# Altium PCB Alarm_clock_layout.pcbdoc
Units mil, origin at the board's own origin, x right, y up, seen from the top; angles counter-clockwise.
Board outline 3937.01 x 2952.76 mil, 2 copper layers (Top Layer, Bottom Layer); 36 components, 40 nets, 128 pads, 1 vias.
Unrouted connection lines stored in the file: 84.
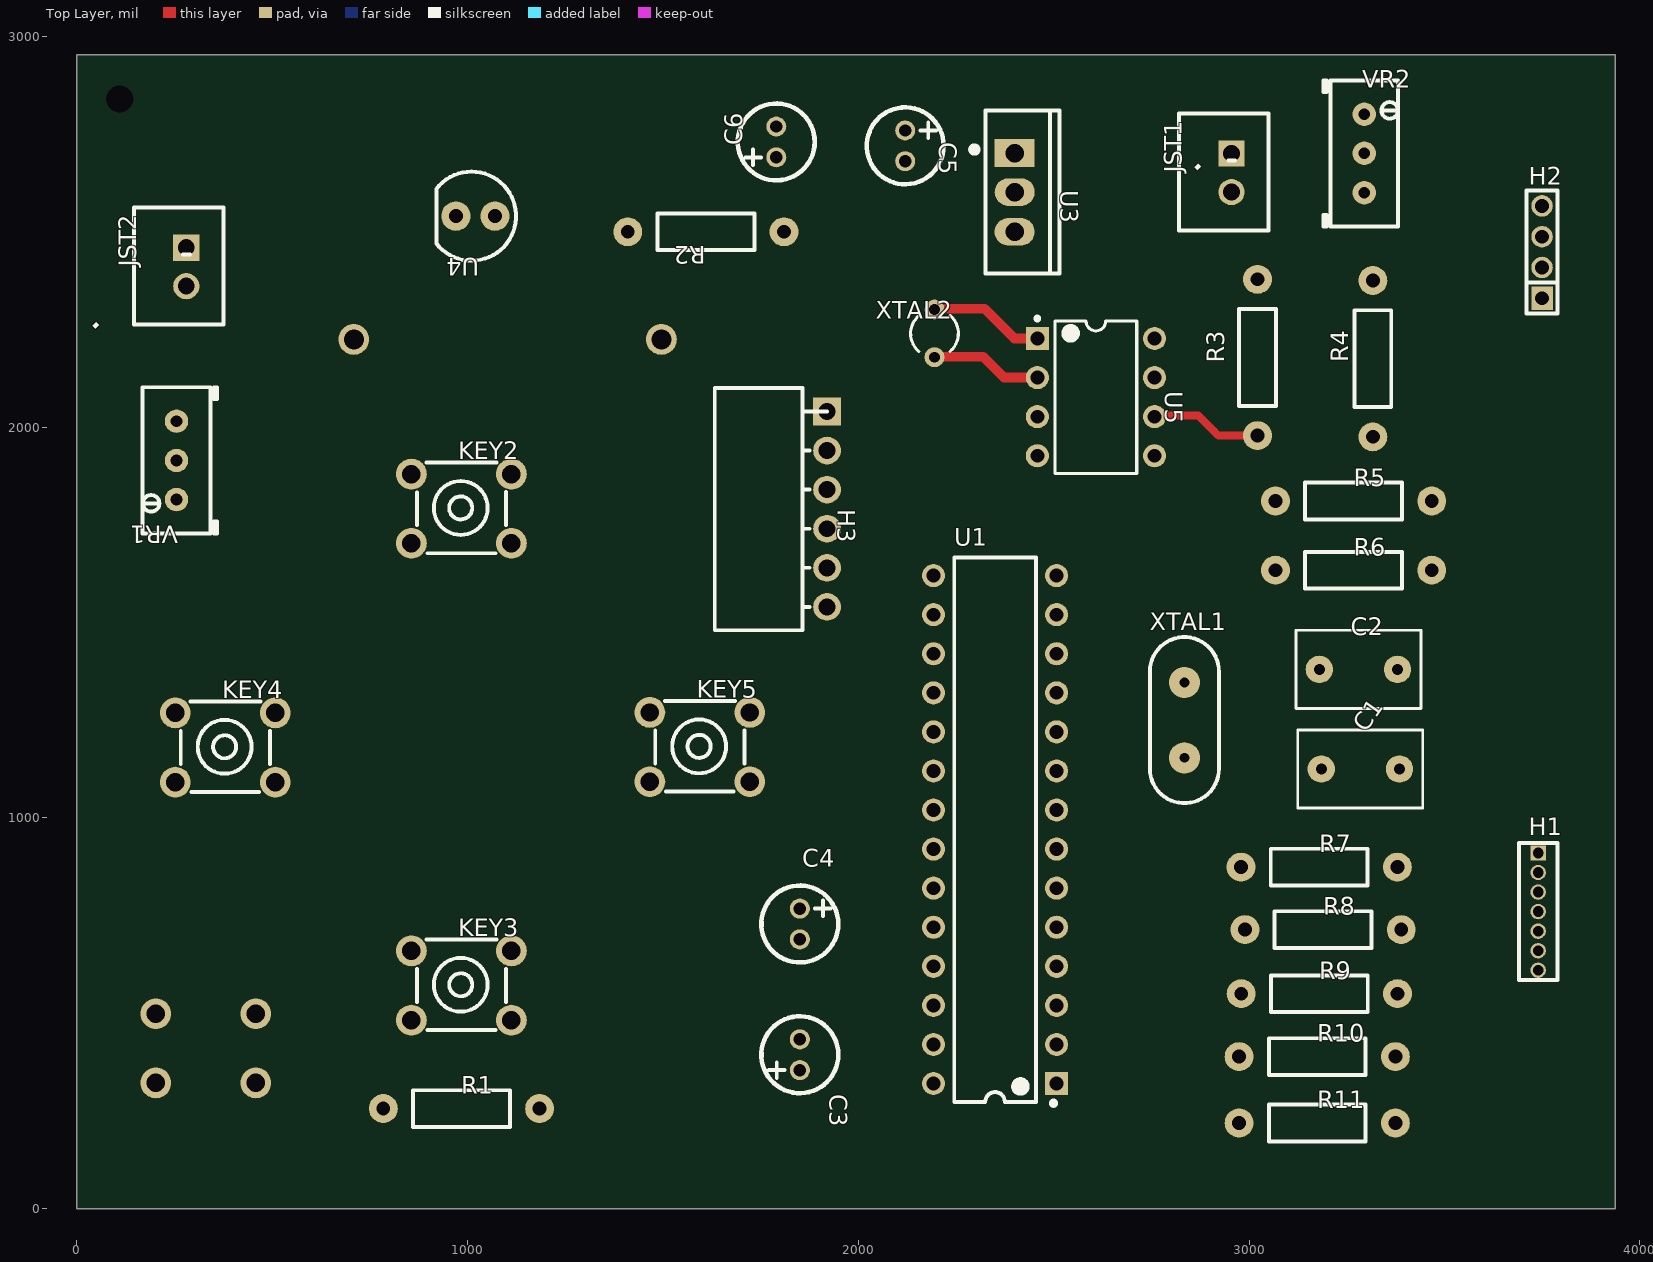
[diagram p0: Top Layer view]
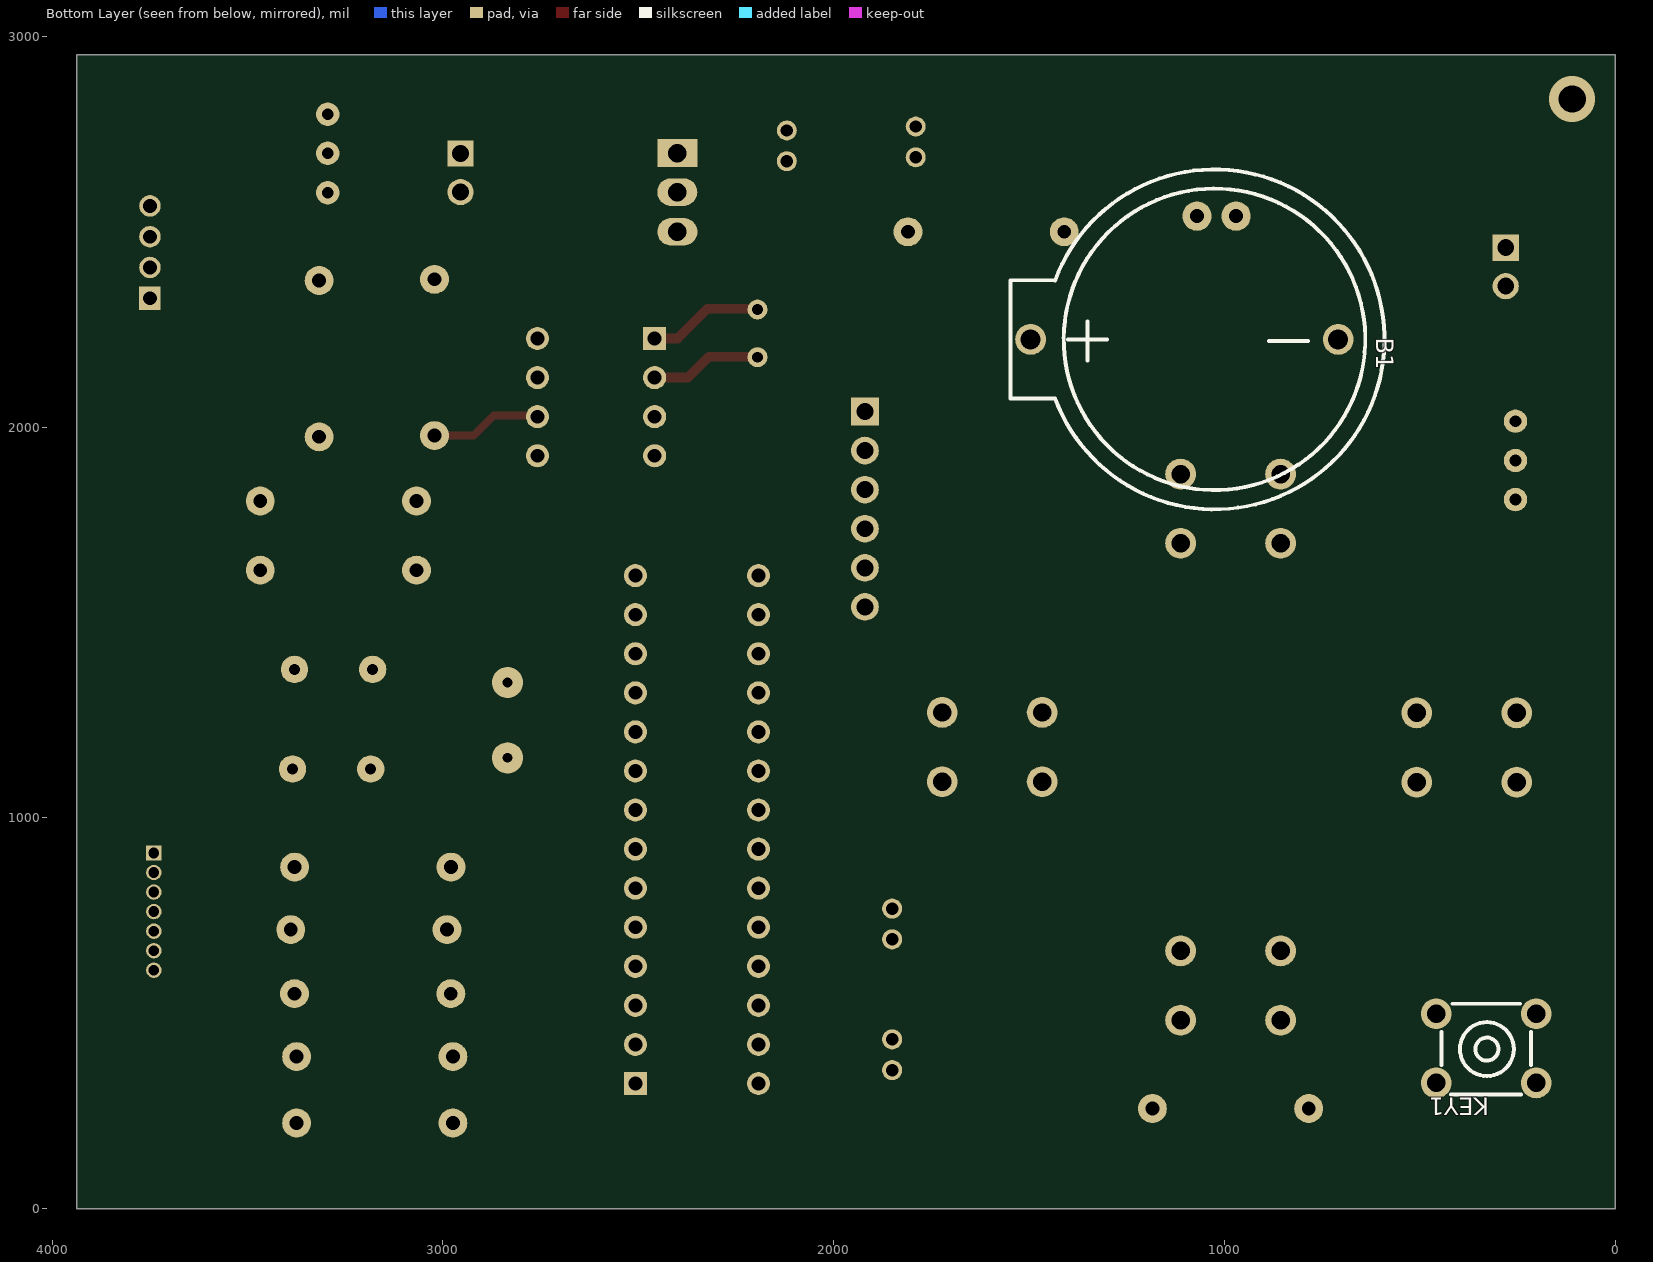
[diagram p1: Bottom Layer view, seen from below]

## Layer stack, top to bottom
Top Solder: solder mask 0.4, Solder Resist, Dk 3.5
Top Layer: signal copper 1.4
Dielectric1: dielectric 12.6, FR-4, Dk 4.8
Bottom Layer: signal copper 1.4
Bottom Solder: solder mask 0.4, Solder Resist, Dk 3.5

## Board outline
3937.01,0 0,0 0,2952.76 3937.01,2952.76

## Design rules (kind name [scope] priority, off if disabled: settings)
Clearance [All] p1: gap=15 ignorepadtopadclearanceinfootprint=FALSE except(10: Arc-THPad Track-THPad SMDPad-THPad THPad-THPad)
ComponentClearance [All] p1 off: gap=10 collisioncheckmode=3 verticalgap=10 showdistances=FALSE
Height [All] p1: minheight=0 maxheight=1181.1 prefheight=500
PolygonConnect [All] p1: connectstyle=Relief reliefconductorwidth=10 reliefentries=4 polygonreliefangle="90 Angle" airgapwidth=10
RoutingVias [All] p1: holewidth=50 width=100 viastyle="Through Hole" minholewidth=28 minwidth=50 maxholewidth=150 maxwidth=200
SolderMaskExpansion [All] p1: expansion=4 istentingtop=FALSE
Width Width_1 [InNet('+5V') or InNet('GND') or InNet('VCC')] p1: maxlimit=30 minlimit=25 preferedwidth=25 minimp=50.000000 maximp=50.000000 favimp=50.000000
Width [All] p2: maxlimit=25 minlimit=20 preferedwidth=20 minimp=50.000000 maximp=50.000000 favimp=50.000000
28 further rules are at their usual default settings.

## Components (designator, comment, footprint, x,y, rotation, side; value= is the part's Value field where it differs from the comment)
B1 "CR2032 3V" BAT-TH_BS-2-1 1102.36,2224.41 r90 bottom
C1 "100nF" RAD-0.2 3285,1125 r0 top
C2 "100nF" RAD-0.2 3280,1380 r0 top
C3 "100nF" CAP-TH_BD5.0-P2.00-D0.8-FD 1850.39,393.7 r90 top
C4 "100nF" CAP-TH_BD5.0-P2.00-D0.8-FD 1850.39,728.35 r270 top
C5 "100nF" CAP-TH_BD5.0-P2.00-D0.8-FD 2120,2720 r270 top
C6 "100nF" CAP-TH_BD5.0-P2.00-D0.8-FD 1790,2730 r90 top
H1 "KEYPAD" HDR-TH_7P-P1.27-V-M 3740,760 r270 top
H2 "LCD_1602" HDR-TH_4P-P2.00-V-M 3750,2448.11 r90 top
H3 "LCD_1602" HDR-TH_6P-P2.54-H-F-W5.7 1920,1790 r270 top
JST1 "JST_2 PIN" CONN-TH_XHB-2A 2955,2650.75 r90 top
JST2 "JST_2 PIN" CONN-TH_XHB-2A 280,2410 r90 top
KEY1 "Push_Button" KEY-TH_4P-L6.0-W6.0-P4.50 330,410 r0 bottom
KEY2 "Push_Button" KEY-TH_4P-L6.0-W6.0-P4.50 984.25,1791.34 r0 top
KEY3 "Push_Button" KEY-TH_4P-L6.0-W6.0-P4.50 984.25,570.87 r0 top
KEY4 "Push_Button" KEY-TH_4P-L6.0-W6.0-P4.50 380,1180 r0 top
KEY5 "Push_Button" KEY-TH_4P-L6.0-W6.0-P4.50 1594.49,1181.1 r0 top
R1 "RESISTOR" AXIAL-0.4 984.25,255.91 r0 top value=Value
R2 "330R" AXIAL-0.4 1610,2500 r180 top value=Value
R3 "10k" AXIAL-0.4 3021.65,2178.35 r90 top value=Value
R4 "10k" AXIAL-0.4 3316.93,2175.2 r90 top value=Value
R5 "100R" AXIAL-0.4 3267.72,1811.02 r0 top value=Value
R6 "100R" AXIAL-0.4 3267.72,1633.86 r0 top value=Value
R7 "100R" AXIAL-0.4 3179.65,873.94 r0 top value=Value
R8 "100R" AXIAL-0.4 3189.65,713.94 r0 top value=Value
R9 "100R" AXIAL-0.4 3180,550 r0 top value=Value
R10 "100R" AXIAL-0.4 3174.65,388.94 r0 top value=Value
R11 "100R" AXIAL-0.4 3174.65,218.94 r0 top value=Value
U1 "ATMEGA _328P-PU" DIP-28_L34.6-W7.3-P2.54-LS10.2-BL 2350,970 r90 top
U3 "7805_Regulator" TO-220-3_L10.0-W4.5-P2.54-L 2400.2,2600.79 r270 top
U4 "LED" "5MM LED" 1070,2540 r180 top
U5 "DS1307" DIP-8_L9.8-W6.6-P2.54-LS7.6-BL 2608.27,2076.77 r270 top
VR1 "1k" RES-ADJ-TH_3296W 255,1915 r180 top
VR2 "1k" RES-ADJ-TH_3296W 3295,2700.39 r0 top
XTAL1 "16MHz" "16MHZ_OSC [PCB]" 2834.65,1250 r180 top
XTAL2 "32.768KHz" R38 2195,2240 r0 top

## Footprints (in the part's own frame and the unit in brackets; to place one, negate y for a bottom-side part, rotate by r counter-clockwise, add the part's x,y. Pads: shape width x height; smd on the part's side, far side on the other; paste and mask are expansions set on the pad)
"5MM LED" [mm]
  round 1.9 hole 0.914: 1(0,0) 2(2.54,0)
  silkscreen extent -1.37,-2.9 3.81,2.9
"16MHZ_OSC [PCB]" [mil]
  round 80 hole 25: 1(0,96.46) 2(0,-96.46)
  silkscreen extent -89,-212 89,212
AXIAL-0.4 [mil]
  round 74 hole 35.4: 1(-200,0) 2(200,0)
  silkscreen extent -124,-47 124,47
BAT-TH_BS-2-1 [mm]
  round 2 hole 1.3: 1(0,10) 2(0,-10)
  silkscreen extent -11.04,-13 11.05,11.3
CAP-TH_BD5.0-P2.00-D0.8-FD [mm]
  round 1.3 hole 0.8: 1(-1,0) 2(1,0)
  silkscreen extent -2.5,-2.5 2.5,2.5
CONN-TH_XHB-2A [mm]
  rect 1.7x1.7 hole 1.1: 1(1.251,0)
  round 1.7 hole 1.1: 2(-1.251,0)
  silkscreen extent -3.75,-2.42 3.86,3.4
DIP-8_L9.8-W6.6-P2.54-LS7.6-BL [mm]
  rect 1.5x1.5 hole 0.9: 1(-3.81,-3.81)
  round 1.5 hole 0.9: 2(-1.27,-3.81) 3(1.27,-3.81) 4(3.81,-3.81) 5(3.81,3.81) 6(1.27,3.81) 7(-1.27,3.81) 8(-3.81,3.81)
  silkscreen extent -5.23,-3.93 4.96,2.65
DIP-28_L34.6-W7.3-P2.54-LS10.2-BL [mm]
  rect 1.5x1.5 hole 0.9: 1(-16.51,-4)
  round 1.5 hole 0.9: 2(-13.97,-4) 3(-11.43,-4) 4(-8.89,-4) 5(-6.35,-4) 6(-3.81,-4) 7(-1.27,-4) 8(1.27,-4) 9(3.81,-4) 10(6.35,-4) 11(8.89,-4) 12(11.43,-4) 13(13.97,-4) 14(16.51,-4) 15(16.51,4) 16(13.97,4) 17(11.43,4) 18(8.89,4) 19(6.35,4) 20(3.81,4) 21(1.27,4) 22(-1.27,4) 23(-3.81,4) 24(-6.35,4) 25(-8.89,4) 26(-11.43,4) 27(-13.97,4) 28(-16.51,4)
  silkscreen extent -17.94,-3.95 17.7,2.65
HDR-TH_4P-P2.00-V-M [mm]
  rect 1.524x1.4 hole 0.9: 1(-3,0)
  round 1.4 hole 0.9: 2(-1,0) 3(1,0) 4(3,0)
  silkscreen extent -4,-1 4,1.02
HDR-TH_6P-P2.54-H-F-W5.7 [mm]
  rect 1.8x1.8 hole 1.1: 1(-6.35,0)
  round 1.8 hole 1.1: 2(-3.81,0) 3(-1.27,0) 4(1.27,0) 5(3.81,0) 6(6.35,0)
  silkscreen extent -7.87,-7.3 7.87,0
HDR-TH_7P-P1.27-V-M [mm]
  rect 1x1 hole 0.7: 1(-3.81,0)
  round 1 hole 0.7: 2(-2.54,0) 3(-1.27,0) 4(0,0) 5(1.27,0) 6(2.54,0) 7(3.81,0)
  silkscreen extent -4.45,-1.25 4.45,1.25
KEY-TH_4P-L6.0-W6.0-P4.50 [mm]
  round 2 hole 1.2: 1(-3.25,-2.25) 2(3.25,-2.25) 3(3.25,2.25) 4(-3.25,2.25)
  silkscreen extent -2.9,-2.9 2.9,3
R38 [mm] "Crystal, Thru-Hole; 2 Leads; Body 3.1 x 8.2 mm (Dia.xH)"
  round 1.3 hole 0.7: 1(0,1.55) 2(0,-1.55)
  silkscreen extent -1.55,-1.19 1.55,1.17
RAD-0.2 [mil]
  round 70 hole 28: 1(100,0) 2(-100,0)
  silkscreen extent -160,-100 160,100
RES-ADJ-TH_3296W [mil]
  round 60 hole 30: 1(0,100.39) 2(0,0.39) 3(0,-100.39)
  silkscreen extent -104,-187 87,187
TO-220-3_L10.0-W4.5-P2.54-L [mm]
  rect 1.8x2.6 hole 1.2: 1(-2.56,0.005)
  oval 1.8x2.6 hole 1.2: 2(-0.02,0.005) 3(2.56,-0.005)
  silkscreen extent -5.32,-2.82 5.28,2.9

## Part data
B1: BOM_JLCPCB Part Class="Extended Part", BOM_Manufacturer=Q&J, BOM_Manufacturer Part=BS-2-1, BOM_Supplier=LCSC, BOM_Supplier Part=C70376, spicePre=B, spiceSymbolName=CR2032-BS-2-1
C1 C2: BOM_Manufacturer=LCSC, BOM_Manufacturer Part="0.1UF(104) +-20% 63v", BOM_Supplier=LCSC, BOM_Supplier Part=C19355, spicePre=C, spiceSymbolName=100nF
C3 C4 C5 C6: BOM_JLCPCB Part Class="Extended Part", BOM_Manufacturer=ValuePro, BOM_Manufacturer Part="0.1UF 50V", BOM_Supplier=LCSC, BOM_Supplier Part=C28061, nameAlias=Capacitance, spicePre=C, spiceSymbolName=0.1uF
H1: BOM_Manufacturer=XFCN(台湾兴飞), BOM_Manufacturer Part=PZ127V-11-07-H25, BOM_Supplier=LCSC, BOM_Supplier Part=C2832274, Contributor=LCSC, spicePre=H, spiceSymbolName=PZ127V-11-07-H25
H2: BOM_Manufacturer=XFCN(台湾兴飞), BOM_Manufacturer Part=MH200V-11-04-1000, BOM_Supplier=LCSC, BOM_Supplier Part=C2839989, Contributor=LCSC, spicePre=H, spiceSymbolName=MH200V-11-04-1000
H3: BOM_Manufacturer=TXGA(特思嘉), BOM_Manufacturer Part=FFH25402-S06B1001K6K, BOM_Supplier=LCSC, BOM_Supplier Part=C2833720, Contributor=LCSC, spicePre=H, spiceSymbolName=FFH25402-S06B1001K6K
JST1 JST2: BOM_JLCPCB Part Class="Extended Part", BOM_Manufacturer=BOOMELE, BOM_Manufacturer Part="XHB-2A Connector", BOM_Supplier=LCSC, BOM_Supplier Part=C57981, image=//image.lceda.cn/szlcsc/C57981.jpg, spicePre=C, spiceSymbolName="JST_2 PIN"
KEY1 KEY2 KEY3 KEY4 KEY5: BOM_Manufacturer=ReliaPro, BOM_Manufacturer Part=button6*6*8.5, BOM_Supplier=LCSC, BOM_Supplier Part=C59980, image=http://image.lceda.cn/szlcsc/C59980.jpg, spicePre=K, spiceSymbolName=Push_Button
R1 R2 R3 R4 R5 R6 R7 R8 R9 R10 R11: BOM_Manufacturer=UniOhm, BOM_Manufacturer Part=MFR0W4F2200A50, Power=1/4W, Tolerance=±1%, BOM_EasyEDA=E57439, BOM_Supplier=EasyEDA, BOM_Supplier Part=E57439, spicePre=R, spiceSymbolName=RESISTOR
U1: BOM_Manufacturer=MICROCHIP, BOM_Manufacturer Part=ATMEGA328P-PU, BOM_Supplier=LCSC, BOM_Supplier Part=C33901, Contributor=LCSC, image=//image.lceda.cn/szlcsc/C33901.jpg, sourceId=Oic6oiASL, spicePre=U, spiceSymbolName="ATMEGA _328P-PU", timeStamp=1451725987
U3: BOM_JLCPCB Part Class="Extended Part", BOM_Manufacturer="Foshan Blue Rocket Elec", BOM_Manufacturer Part=7805, BOM_Supplier=LCSC, BOM_Supplier Part=C305416, Contributor=LCSC, spicePre=U, spiceSymbolName=7805_Regulator
U4: BOM_Manufacturer Part="5mm LED", Contributor=Axbri, spicePre=U, spiceSymbolName=LED
U5: BOM_JLCPCB Part Class="Extended Part", BOM_Manufacturer=MAXIM, BOM_Manufacturer Part=DS1307+, BOM_Supplier=LCSC, BOM_Supplier Part=C59267, spicePre=U, spiceSymbolName=DS1307+
VR1 VR2: BOM_Manufacturer=ReliaPro, BOM_Manufacturer Part=Pot-100R, BOM_Supplier=LCSC, BOM_Supplier Part=C13649, nameAlias=Resistance(Ohms), spicePre=V, spiceSymbolName=Pot-100R
XTAL1: BOM_Manufacturer=SHIVRAM, BOM_Manufacturer Part=0SC-16MHz, BOM_Supplier=SHIVRAM, BOM_Supplier Part=0SC-16MHz, Contributor="Mantas Petrauskas", nameAlias=Frequency, spicePre=X, spiceSymbolName="Crystal Oscillator"
XTAL2: library part XTAL, "Crystal Oscillator", LatestRevisionDate=17-Jul-2002, LatestRevisionNote="Re-released for DXP Platform.", PackageDescription="Crystal, Thru-Hole; 2 Leads; Body 3.1 x 8.2 mm (Dia.xH)", PackageReference=R38, Published=8-Jun-2000, Publisher="Altium Limited"

## Via types
v1: diameter 50/118.11 (per signal layer), hole 70, Top Layer to Bottom Layer, 1 vias

## Nets (pads, with @x,y where several pads share a name; then routed paths per layer and width w, separated by ;. In a path a pad name is that pad's centre, name@x,y a point inside that pad or via, vN(x,y) a via of type N, cw(c..) or ccw(c..) an arc to the next point about the centre after c; other vN are vias at no path point)
1: R5.1 U1.12
2: R6.1 U1.11
3: R7.1 U1.6
+5V: C6.1 H2.2 R1.2 R2.1 R3.2 R4.2 U1.7 U1.20 U3.3 U5.8 VR2.3
A: R8.1 U1.5
B: R9.1 U1.4
BACK: KEY5.1 KEY5.2 U1.26
C: R10.1 U1.3
D: R11.1 U1.2
D4: H3.3 U1.16 | length 16.1
  Top Layer w10: H3.3 H3.3@1931.39,1851.39
D5: H3.4 U1.17
D6: H3.5 U1.18
D7: H3.6 U1.19
DOWN: KEY3.1 KEY3.2 U1.24
E: H3.2 U1.15
GND: B1.2 C1.1 C2.1 C3.2 C4.2 C5.2 C6.2 H2.1 H2.4 JST1.2 JST2.1 KEY1.1 KEY1.2 KEY2.3 KEY2.4 KEY3.3 KEY3.4 KEY4.3 KEY4.4 KEY5.3 KEY5.4 U1.8 U1.22 U3.2 U4.2 U5.4 VR1.3 VR2.1 | length 5
  Top Layer w20: U1.8@2502.48,1025 U1.8@2507.52,1025
NetB1_1: B1.1 U5.3
NetC1_2: C1.2 U1.9 XTAL1.1
NetC2_2: C2.2 U1.10 XTAL1.2
NetC3_1: C3.1 KEY1.3 KEY1.4 R1.1 U1.1 | length 10
  Top Layer w10: U1.1 U1.1@2507.48,330
NetC4_1: C4.1 U1.21 | length 7.1
  Top Layer w10: U1.21@2187.52,1025 U1.21
NetH1_1: H1.1 R5.2
NetH1_2: H1.2 R6.2
NetH1_3: H1.3 R7.2
NetH1_4: H1.4 R8.2
NetH1_5: H1.5 R9.2
NetH1_6: H1.6 R10.2
NetH1_7: H1.7 R11.2
NetH2_3: H2.3 VR2.2
NetJST2_2: JST2.2 VR1.1
NetR2_2: R2.2 U4.1
NetU5_1: U5.1 XTAL2.1 | length 285.2
  Top Layer w25: XTAL2.1@2204.72,2303.15 2322.83,2303.15 2399.21,2226.77 U5.1
NetU5_2: U5.2 XTAL2.2 | length 290.3
  Top Layer w25: XTAL2.2@2190,2180 2320,2180 2373.23,2126.77 U5.2
OK: KEY4.1 KEY4.2 U1.25
RS: H3.1 U1.14
SCL: R3.1 U1.28 U5.6 | length 283
  Top Layer w20: U5.6@2760,2030 2870,2030 2910,1990 ; 2910.03,1989.97 2921.65,1978.35 R3.1
SDA: R4.1 U1.27 U5.5 | length 10
  Top Layer w15: R4.1@3311.93,1970.2 R4.1@3311.93,1980.2
SPEAKER: U1.13 VR1.2
UP: KEY2.1 KEY2.2 U1.23
VCC: C5.1 JST1.1 U3.1
pads on no net: U5.7
copper on no net:
  other v1: 110,2840

## Silkscreen, mask and mechanical layers (free items; w line width, h text height)
Document:
  lines w5.91: 0,0 0,196.85 ; 374.02,1181.1 374.02,1181.1 ; 1594.49,1181.1 1594.49,1181.1
  lines w9.84: 0,1181.1 1.1,1180 984.25,1180 984.25,1791.34 ; 984.25,1791.34 374.02,1181.1 984.25,570.87 1594.49,1181.1 984.25,1791.34